# Altium PCB 28Pin_PCB.PcbDoc (part 2 of 2)
Units mm, origin at the board's own origin, x right, y up, seen from the top; angles counter-clockwise.
Board outline 68.58 x 53.34 mm, 2 copper layers (Top Layer, Bottom Layer); 103 components, 71 nets, 321 pads, 0 vias.
Unrouted connection lines stored in the file: 209.
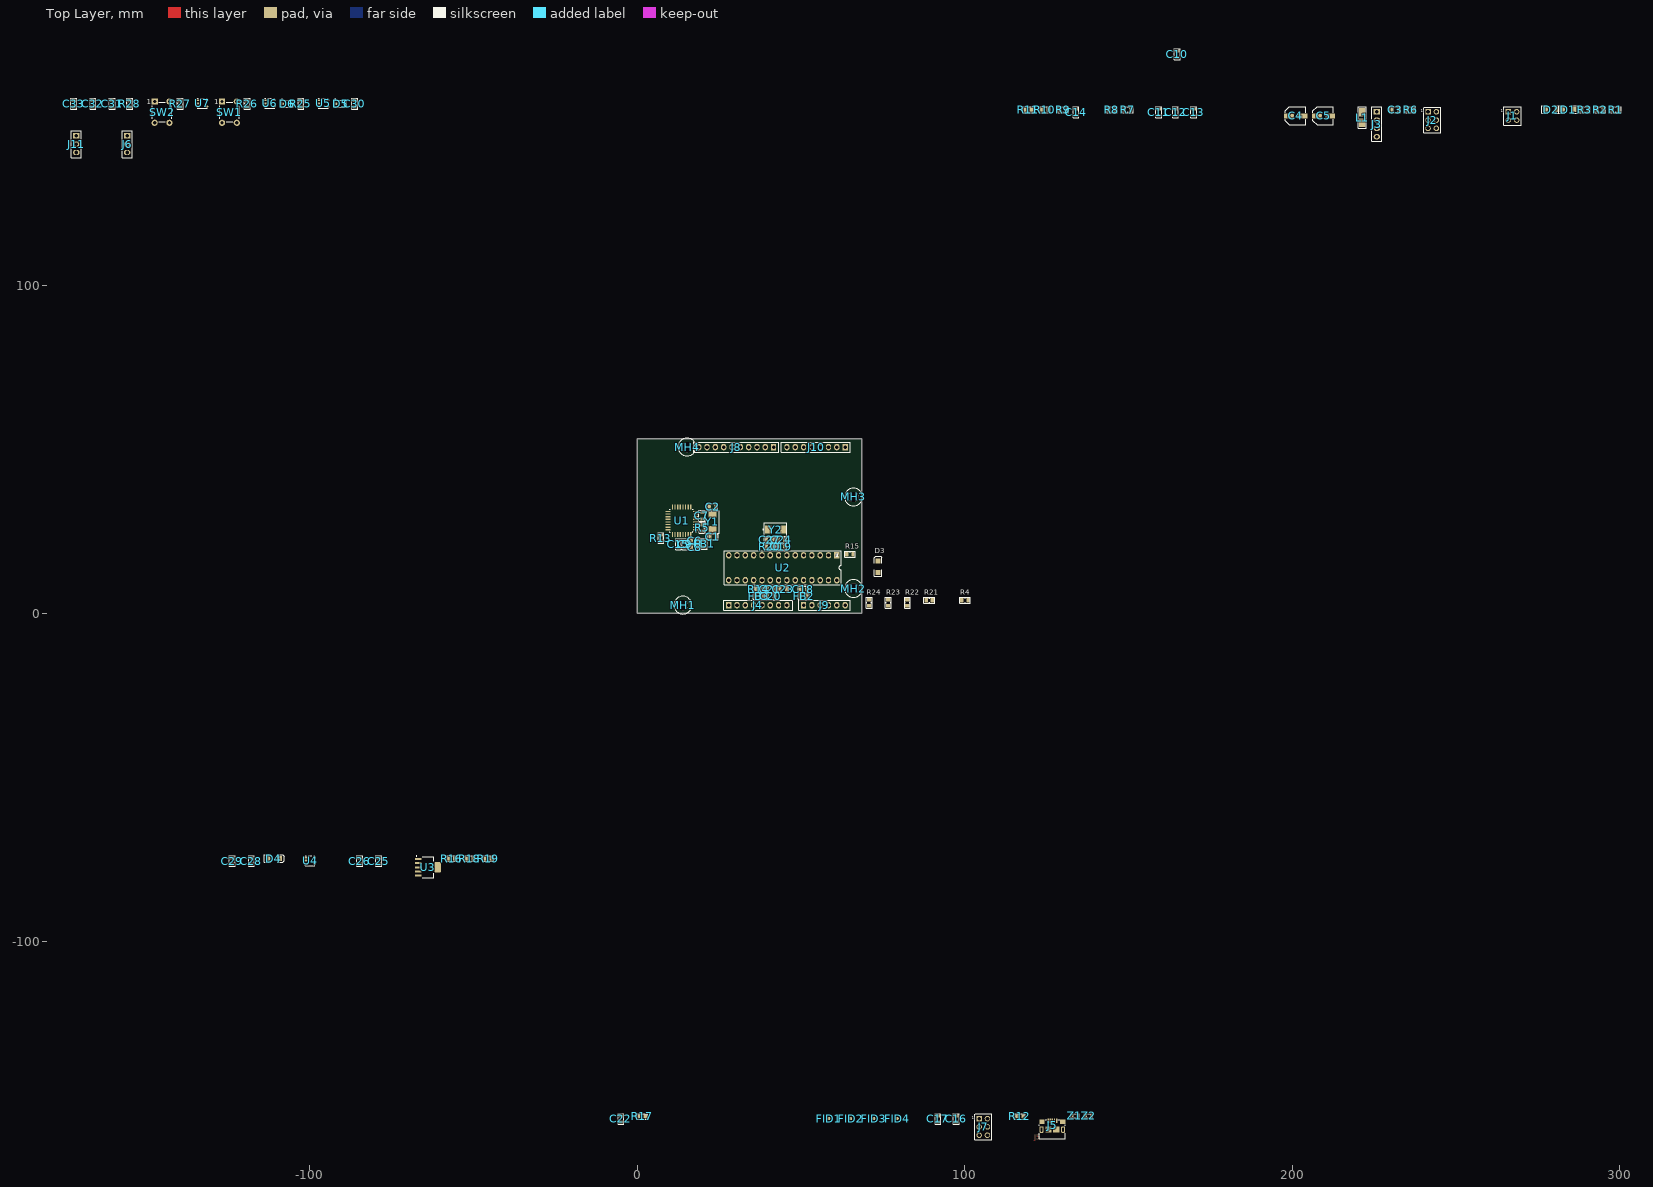
[diagram p0: Top Layer view]

## Part data (continued)
R6 R7 R10 R14 R26 R27 R28: library part CRG0805F22R, "Resistor;  Thick Film;  Res 22 Ohms;  Pwr-Rtg0.125 W;  Tol 1%;  SMT;  0805", Case Code (Imperial)=0805, Case Code (Metric)=2012, Manufacturer="TE Connectivity", Max Operating Temperature=125°C, Min Operating Temperature=-55°C, Number of Resistors=1, Package Quantity=5000, Power Rating=125mW, Resistor Type="Thick Film", Supplier Part Number 1=A126352CT-ND, Temperature Coefficient=200ppm/°C, Tolerance=1%, Voltage Rating=150V, Case/Package=0805, Category="Chip SMD Resistors", ComponentLink1Description=https://datasheet.ciiva.com/11811/0900766b800a696e-11811612.pdf?src-supplier=RSComponents, ComponentLink1URL=https://datasheet.ciiva.com/11811/0900766b800a696e-11811612.pdf?src-supplier=RSComponents, ComponentLink2Description=https://datasheet.ciiva.com/16756/70063020-16756062.pdf?src-supplier=Allied+Electronics, ComponentLink2URL=https://datasheet.ciiva.com/16756/70063020-16756062.pdf?src-supplier=Allied+Electronics, ComponentLink3Description=https://datasheet.ciiva.com/5551/eng-ds-1773204-g-5551510.pdf?src-supplier=Mouser, ComponentLink3URL=https://datasheet.ciiva.com/5551/eng-ds-1773204-g-5551510.pdf?src-supplier=Mouser, ComponentLink4Description=https://datasheet.ciiva.com/24476/eng-ds-1773204-e-24476806.pdf?src-supplier=Onlinecomponents.com, ComponentLink4URL=https://datasheet.ciiva.com/24476/eng-ds-1773204-e-24476806.pdf?src-supplier=Onlinecomponents.com, Depth=1.25mm, ELV=Compliant, Height=0.55mm, Length=2mm, Manufacturer Part Number=CRG0805F22R, Mount="Surface Mount", Number of Terminations=2, Packaging="Tape and Reel", Pricing 1="1=0.10000, 10=0.05100, 100=0.02090, 1000=0.00939, 2500=0.00815 (USD)", Radiation Hardening=No, Resistance=22R, RoHS=Yes, Stock 1=61583, Supplier 1=Digi-Key, Termination=Solder, Weight=0.000194oz, Width=1.25mm
R8 R11 R12: library part CPF0805B1K0E1, "TE CONNECTIVITY / NEOHM         CPF0805B1K0E1             SMD Chip Resistor, Thin Film, 1 kohm, 100 V, 0805 [2012 Metric], 100 mW,  0.1%, CPF Series", Case Code (Imperial)=0805, Case Code (Metric)=2012, Manufacturer="TE Connectivity Neohm", Max Operating Temperature=155°C, Min Operating Temperature=-55°C, Number of Resistors=1, Package Quantity=1000, Power Rating=100mW, Resistance=1kR, Resistance Tolerance=0.1%, Resistor Type="Thin Film", Supplier Part Number 1=A103165CT-ND, Temperature Coefficient=25ppm/°C, Voltage Rating=100V, Voltage Rating (DC)=200V, Case/Package=0805, Category="Chip SMD Resistors", ComponentLink1Description=https://datasheet.ciiva.com/30182/29261eng-ds-1773200-f-30182135.pdf?src-supplier=Onlinecomponents.com, ComponentLink1URL=https://datasheet.ciiva.com/30182/29261eng-ds-1773200-f-30182135.pdf?src-supplier=Onlinecomponents.com, ComponentLink2Description=https://datasheet.ciiva.com/7943/eng-ds-1773200-j-7943743.pdf?src-supplier=Element14, ComponentLink2URL=https://datasheet.ciiva.com/7943/eng-ds-1773200-j-7943743.pdf?src-supplier=Element14, ELV=Compliant, Height=0.55mm, Length=2mm, Manufacturer Part Number=CPF0805B1K0E1, Mount="Surface Mount", Number of Terminations=2, Packaging="Tape and Reel", Pricing 1="1=0.59000, 10=0.42100, 100=0.21890 (USD)", REACH SVHC="No SVHC", RoHS=Yes, RoHS Compliant=Yes, Series=CPF, Stock 1=1825, Supplier 1=Digi-Key, Termination=Solder, Tolerance=0.1%, Weight=0.000194oz, Width=1.25mm
R9 R13 R18 R19: library part RC0805JR-130RL, "Res Thick Film 0805 0 Ohm Molded SMD Paper T/R", Case Code (Imperial)=0805, Case Code (Metric)=2012, Manufacturer=Yageo, Max Operating Temperature=155°C, Min Operating Temperature=-55°C, Package Quantity=20000, Power Rating=125mW, Resistance=0mR, Resistor Type="Thick Film", Supplier Part Number 1=13-RC0805JR-130RLCT-ND, Temperature Coefficient=200ppm/°C, Tolerance=5%, Voltage Rating=150V, Case/Package=0805, Category="Chip SMD Resistors", ComponentLink1Description=https://datasheet.ciiva.com/17422/rc0805-17422885.pdf?src-supplier=Future+Electronics, ComponentLink1URL=https://datasheet.ciiva.com/17422/rc0805-17422885.pdf?src-supplier=Future+Electronics, ComponentLink2Description=https://datasheet.ciiva.com/5602/rc0805-257173-5602072.pdf?src-supplier=Mouser, ComponentLink2URL=https://datasheet.ciiva.com/5602/rc0805-257173-5602072.pdf?src-supplier=Mouser, Contact Plating=Tin,Matte, Height=0.5mm, Lead Free="Lead Free", Length=2mm, Manufacturer Part Number=RC0805JR-130RL, Packaging="Tape and Reel", Pricing 1="1=0.10000, 10=0.03600, 100=0.01450, 1000=0.00652, 2500=0.00566, 5000=0.00468 (USD)", Radiation Hardening=No, REACH SVHC=Unknown, RoHS=Yes, RoHS Compliant=Yes, Series=RC, Size Code=0805, Stock 1=30556, Supplier 1=Digi-Key, Termination=SMD/SMT, Voltage Rating (DC)=150V, Width=1.25mm
SW1 SW2: "6X6, H5,  160G TAC.SWITCH", Actuator Color=Black, Contact Current Rating=50mA, Contact Resistance=100mR, Manufacturer="TE Connectivity Alcoswitch", Max Operating Temperature=85°C, Max Voltage Rating (DC)=24V, Min Operating Temperature=-35°C, Operating Force=160gf, Package Quantity=750, Supplier Part Number 1=450-1650-ND, Actuator Length=0.055inch, Actuator Material=PBT, Actuator Type=Standard, Category="Pushbutton Switches", ComponentLink1Description=https://datasheet.ciiva.com/30199/1825910-6rqpn1825910-6-30199520.pdf?src-supplier=Onlinecomponents.com, ComponentLink1URL=https://datasheet.ciiva.com/30199/1825910-6rqpn1825910-6-30199520.pdf?src-supplier=Onlinecomponents.com, ComponentLink2Description=https://datasheet.ciiva.com/15184/getdatasheetpartid-395915-15184509.pdf?src-supplier=Verical, ComponentLink2URL=https://datasheet.ciiva.com/15184/getdatasheetpartid-395915-15184509.pdf?src-supplier=Verical, Contact Material="Copper Alloy", Contact Plating=Silver, Electrical Life=100000Cycles, ELV=Compliant, Illumination Type=Non-Illuminated,Illuminated, Lead Free="Lead Free", Length=5.99mm, Manufacturer Part Number=1825910-6, Max Current Rating=50mA, Mechanical Life=100000Cycles, Mount="Through Hole", Orientation=Straight, Packaging="Loose Piece", Pricing 1="1=0.10000, 10=0.10100, 25=0.09560, 100=0.08700, 250=0.08180, 500=0.07484, 1000=0.06265, 2500=0.06091, 5000=0.05743 (USD)", REACH SVHC=Unknown, RoHS=Yes, RoHS Compliant=Yes, Series=FSMJ, Stock 1=37167, Supplier 1=Digi-Key, Switch Function=Off-Mom, Switch Travel=0.25mm, Termination="PC Pins", Throw Configuration=SPST, Type=Switch
U1: "MICROCHIP - ATMEGA16U2-AU - MCU, 8BIT, MEGAAVR, 16MHZ, TQFP-32", Case/Package=A, Frequency=16MHz, Manufacturer="Microchip / Atmel", Max Operating Temperature=85°C, Max Supply Voltage=5.5V, Min Operating Temperature=-40°C, Min Supply Voltage=2.7V, Package Quantity=1250, Supplier Part Number 1=ATMEGA16U2-AU-ND, Category=Microcontrollers, ComponentLink1Description=https://datasheet.ciiva.com/13036/doc7799-28769-13036800.pdf?src-supplier=Mouser, ComponentLink1URL=https://datasheet.ciiva.com/13036/doc7799-28769-13036800.pdf?src-supplier=Mouser, ComponentLink2Description=https://datasheet.ciiva.com/22651/doc7799-22651110.pdf?src-supplier=Farnell, ComponentLink2URL=https://datasheet.ciiva.com/22651/doc7799-22651110.pdf?src-supplier=Farnell, Contact Plating=Tin,Matte, Core Architecture=AVR, Data Bus Width=8b, Height=1.05mm, Interface=SPI,UART,USB,USART,Serial, Lead Free="Lead Free", Length=7mm, Manufacturer Part Number=ATMEGA16U2-AU, Max Frequency=16MHz, Memory Size=16KB, Memory Type=FLASH, Mount="Surface Mount", Number of I/Os=22, Number of Pins=32, Number of Programmable I/O=22, Number of PWM Channels=5, Number of SPI Channels=1, Number of Timers/Counters=2, Oscillator Type=Internal, Packaging=Tray, Peripherals="Brown-out Detect/Reset,POR,PWM,WDT", Pricing 1="1=2.83000, 25=2.59600, 100=2.35400 (USD)", RAM Size=512B, REACH SVHC="No SVHC", RoHS=Yes, RoHS Compliant=Yes, Series="AVR® ATmega", Stock 1=4215, Supplier 1=Digi-Key, Watchdog Timer=Yes, Width=7mm
U2: "IC MCU 8BIT 32KB FLASH 28DIP", Case/Package=PDIP, Frequency=20MHz, Manufacturer="Microchip / Atmel", Max Operating Temperature=85°C, Max Supply Voltage=5.5V, Min Operating Temperature=-40°C, Min Supply Voltage=1.8V, Package Quantity=14, Category=Microcontrollers, ComponentLink1Description=https://datasheet.ciiva.com/19457/2139111-19457070.pdf?src-supplier=Jameco, ComponentLink1URL=https://datasheet.ciiva.com/19457/2139111-19457070.pdf?src-supplier=Jameco, ComponentLink2Description=https://datasheet.ciiva.com/1157/1684409-1157696.pdf?src-supplier=Element14, ComponentLink2URL=https://datasheet.ciiva.com/1157/1684409-1157696.pdf?src-supplier=Element14, ComponentLink3Description=https://datasheet.ciiva.com/20168/73-4283-20168380.pdf?src-supplier=Rapid+Electronics, ComponentLink3URL=https://datasheet.ciiva.com/20168/73-4283-20168380.pdf?src-supplier=Rapid+Electronics, ComponentLink4Description=https://datasheet.ciiva.com/29119/155197-da-01-en-microcontr-atmega328p-pu-8bit-pdip-28-29119593.pdf?src-supplier=Conrad, ComponentLink4URL=https://datasheet.ciiva.com/29119/155197-da-01-en-microcontr-atmega328p-pu-8bit-pdip-28-29119593.pdf?src-supplier=Conrad, ComponentLink5Description=https://datasheet.ciiva.com/26818/atmega328p-pu-26818578.pdf?src-supplier=IIIC, ComponentLink5URL=https://datasheet.ciiva.com/26818/atmega328p-pu-26818578.pdf?src-supplier=IIIC, ComponentLink6Description=https://datasheet.ciiva.com/15213/getdatasheetpartid-318533-15213133.pdf?src-supplier=Verical, ComponentLink6URL=https://datasheet.ciiva.com/15213/getdatasheetpartid-318533-15213133.pdf?src-supplier=Verical, Contact Plating=Tin,Matte, Core Architecture=AVR, Data Bus Width=8b, Height=3.28mm, Interface=I2C,SPI,UART,USART,2-Wire, Lead Free="Lead Free", Length=37.4mm, Manufacturer Part Number=ATMEGA328P-PU, Max Frequency=20MHz, Memory Size=32KB, Memory Type=FLASH, Mount="Through Hole", Number of ADC Channels=6, Number of I2C Channels=1, Number of I/Os=23, Number of Pins=28, Number of Programmable I/O=23, Number of PWM Channels=6, Number of SPI Channels=1, Number of Timers/Counters=3, Oscillator Type=Internal, Packaging=Rail/Tube, Peripherals="Brown-out Detect/Reset,POR,PWM,WDT", Pricing 1="1=2.52000, 25=2.31000, 100=2.09000 (USD)", Radiation Hardening=No, RAM Size=2KB, REACH SVHC="No SVHC", RoHS=Yes, RoHS Compliant=Yes, Series="AVR® ATmega", Stock 1=54032, Watchdog Timer=Yes, Width=6.76mm
U3: "1.5-A, 20-V, low-dropout voltage regulator with reverse current & reverse voltage protection 6-SOT-223 -40 to 125", Package="SOT-223-6 Texas Instruments", Arrow_Electronics-Purchase-URL=https://snapeda.com/shop?store=Arrow+Electronics&id=424520, BuyPart=https://www.snapeda.com/parts/TL1963A-33DCQR/Texas%20Instruments/view-part/424520/?ref=eda, Digi-Key_Part_Number=296-24534-1-ND, MF="Texas Instruments", Mouser-Purchase-URL=https://snapeda.com/shop?store=Mouser&id=424520, MP=TL1963A-33DCQR, SnapEDA_Link=https://www.snapeda.com/parts/TL1963A-33DCQR/Texas%20Instruments/view-part/424520/?ref=snap, Texas_Instruments-Purchase-URL=https://snapeda.com/shop?store=Texas+Instruments&id=424520
U4 U5 U6 U7: "TEXAS INSTRUMENTS - SN74AHC1G09DBVR - AND Gate, 74AHC1G09, 2 Input, 2 V to 5.5 V, SOT-23-5", Case/Package=SOT-23, Low Level Output Current=8mA, Manufacturer="Texas Instruments", Max Operating Temperature=125°C, Max Supply Voltage=5.5V, Min Operating Temperature=-55°C, Min Supply Voltage=2V, Output Current=25mA, Package Quantity=3000, Quiescent Current=1uA, Supplier Part Number 1=296-29202-1-ND, Category="Logic Gates", ComponentLink1Description=https://datasheet.ciiva.com/1864/sn74ahc1g09-1864410.pdf?src-supplier=Digi-Key, ComponentLink1URL=https://datasheet.ciiva.com/1864/sn74ahc1g09-1864410.pdf?src-supplier=Digi-Key, ComponentLink2Description=https://datasheet.ciiva.com/1864/sn74ahc1g09-1864411.pdf?src-supplier=Digi-Key, ComponentLink2URL=https://datasheet.ciiva.com/1864/sn74ahc1g09-1864411.pdf?src-supplier=Digi-Key, ComponentLink3Description=https://datasheet.ciiva.com/1864/sn74ahc1g09-1864412.pdf?src-supplier=Digi-Key, ComponentLink3URL=https://datasheet.ciiva.com/1864/sn74ahc1g09-1864412.pdf?src-supplier=Digi-Key, Contact Plating=Tin,Matte, Lead Free="Lead Free", Logic Function="AND GATE", Manufacturer Part Number=SN74AHC1G09DBVR, Mount="Surface Mount", Number of Bits=1, Number of Circuits=1, Number of Elements=1, Number of Gates=1, Number of Inputs=2, Number of Outputs=1, Number of Pins=5, Output Voltage=5.5V, Packaging="Tape and Reel", Pricing 1="1=0.36000, 10=0.27100, 25=0.23760, 100=0.15370, 250=0.12720, 500=0.10176, 1000=0.07802 (USD)", Propagation Delay=7.5ns, Radiation Hardening=No, REACH SVHC="No SVHC", RoHS=Yes, RoHS Compliant=Yes, Series=74AHC, Supplier 1=Digi-Key, Technology=CMOS
Y1 Y2: "16MHz Â±30ppm Crystal Series 60 Ohms 2-SMD, No Lead", Package="SMD-2 ECS International", Supplier Part Number 1=XC983CT-ND, Availability=Unavailable, MF="ECS Inc.", MP=ECS-160-S-23A-EN-TR, Price=None, SnapEDA_Link=https://www.snapeda.com/parts/ECS-160-S-23A-EN-TR/ECS%20Inc./view-part/2122006/?ref=snap, Supplier 1=Digi-Key
Z1 Z2: "VARISTOR 0603", Capacitance=0.05pF, Case Code (Imperial)=0603, Case Code (Metric)=1608, Clamping Voltage=25V, Current Rating=5nA, Manufacturer=Bourns, Max Operating Temperature=125°C, Max Voltage Rating (DC)=5V, Min Operating Temperature=-40°C, Package Quantity=1, Supplier Part Number 1=CG0603MLU-05ECT-ND, Case/Package=0603, Category=Varistors, ComponentLink1Description=https://datasheet.ciiva.com/366/mlu-366240.pdf?src-supplier=Digi-Key, ComponentLink1URL=https://datasheet.ciiva.com/366/mlu-366240.pdf?src-supplier=Digi-Key, ComponentLink2Description=https://datasheet.ciiva.com/22696/1785238-22696784.pdf?src-supplier=Element14, ComponentLink2URL=https://datasheet.ciiva.com/22696/1785238-22696784.pdf?src-supplier=Element14, ComponentLink3Description=https://datasheet.ciiva.com/15142/getdatasheetpartid-26780-15142979.pdf?src-supplier=Verical, ComponentLink3URL=https://datasheet.ciiva.com/15142/getdatasheetpartid-26780-15142979.pdf?src-supplier=Verical, ComponentLink4Description=https://datasheet.ciiva.com/11834/0900766b80dbb950-11834607.pdf?src-supplier=RSComponents, ComponentLink4URL=https://datasheet.ciiva.com/11834/0900766b80dbb950-11834607.pdf?src-supplier=RSComponents, ComponentLink5Description=https://datasheet.ciiva.com/10437/mlu-10437034.pdf?src-supplier=Avnet, ComponentLink5URL=https://datasheet.ciiva.com/10437/mlu-10437034.pdf?src-supplier=Avnet, ComponentLink6Description=https://datasheet.ciiva.com/25958/mlu-25958235.pdf?src-supplier=Avnet+Europe, ComponentLink6URL=https://datasheet.ciiva.com/25958/mlu-25958235.pdf?src-supplier=Avnet+Europe, ComponentLink7Description=https://datasheet.ciiva.com/366/mlu-366238.pdf?src-supplier=Digi-Key, ComponentLink7URL=https://datasheet.ciiva.com/366/mlu-366238.pdf?src-supplier=Digi-Key, ComponentLink8Description=https://datasheet.ciiva.com/366/mlu-366239.pdf?src-supplier=Digi-Key, ComponentLink8URL=https://datasheet.ciiva.com/366/mlu-366239.pdf?src-supplier=Digi-Key, Contact Plating=Tin, Depth=0.8mm, Leakage Current=5nA, Length=1.6mm, Manufacturer Part Number=CG0603MLU-05E, Mount="Surface Mount", Number of Channels=1, Number of Circuits=1, Number of Pins=2, Operating Supply Voltage=5V, Packaging="Tape and Reel", Pricing 1="1=0.43000, 10=0.36000, 25=0.31520, 100=0.27000, 250=0.23400, 500=0.19800, 1000=0.15300, 2500=0.13950 (USD)", Radiation Hardening=No, REACH SVHC="No SVHC", Response Time=1ns, RoHS=Yes, RoHS Compliant=Yes, Series=MLU, Stock 1=2050, Supplier 1=Digi-Key, Termination=SMD/SMT, Voltage=5V, Voltage Rating=5V, Voltage Rating (DC)=5V, Width=0.8mm, Working Voltage=5V

## Nets (pads, with @x,y where several pads share a name; then routed paths per layer and width w, separated by ;. In a path a pad name is that pad's centre, name@x,y a point inside that pad or via, vN(x,y) a via of type N, cw(c..) or ccw(c..) an arc to the next point about the centre after c; other vN are vias at no path point)
16U2_16MHZ_XTAL1: C2.2 R5.1 U1.2 Y1.1
16U2_16MHZ_XTAL2: C1.2 R5.2 U1.1 Y1.2
16U2_BUF_RESETn: C33.2 R28.2 U7.1 U7.2
16U2_MISO: J2.1 U1.17
16U2_MOSI: J2.4 U1.16
16U2_PB4: J1.1 J3.2 U1.18
16U2_PB5: J1.3 U1.19
16U2_PB6: J1.2 U1.20
16U2_PB7: J1.4 U1.21
16U2_RESETn: J3.4 R4.1 U1.24 U7.4
16U2_Rx_LED: D2.2 U1.10
16U2_RXD: R11.1 U1.8
16U2_SCLK: J2.3 R6.2
16U2_SCLK_R: R6.1 U1.15
16U2_Tx_LED: D1.2 U1.11
16U2_TXD: R8.1 U1.9
16U2PROG_328P_RESETn: J6.2 R1.1 U1.13
"328P RESETn": J4.3 J10.2 R11.2 R15.1 U2.1 U2.3
328P_16MHZ_XTAL1: C27.2 R20.1 U2.10 Y2.1
328P_16MHZ_XTAL2: C24.2 R20.2 U2.9 Y2.2
328P_AUTORESETn: C14.1 R21.1 U6.1
328P_BUF_RESETn: C32.2 R27.2 U6.2
328P_RESETn: J3.1 U6.4
+3V3: C12.1 C26.2 J4.4 J11.1 R19.2 U3.3
+3V3_16U2_UCAP: C15.2 R13.1 U1.27
+5: C9.2 U1.31
+5V: C5.1 C10.1 C25.2 J4.5 J11.3 L1.2 R18.1 U3.1
+5V/3V3: C3.2 C11.1 C13.2 C16.2 C22.2 C28.1 C29.1 C30.1 D5.1 D6.1 FB1.1 FB2.1 FB3.1 J2.2 J4.2 J7.2 J11.2 R1.2 R2.1 R3.1 R4.2 R15.2 R16.2 R17.2 R18.2 R19.1 R21.2 R22.1 R23.1 R24.1 U4.5 U5.5 U6.5 U7.5
+5V/3V3_16U2: C6.2 C7.2 C8.2 FB1.2 R13.2 U1.4 U1.32
+5V/3V3_328P_AVCC: C20.2 C21.2 FB3.2 U2.20
+5V/3V3_328P_VCC: C18.2 C19.2 FB2.2 U2.7
+5V_USB: C4.1 J5.1 L1.1
+AREF: C17.2 C23.2 J8.8 U2.21
AD0: J9.1 U2.23
AD1: J9.2 U2.24
AD2: J9.3 U2.25
AD3: J9.4 U2.26
AD4/SDA: J8.9 J9.5 U2.27
AD5/SCl: J8.10 J9.6 U2.28
BUTTON_RESETn: D5.2 R22.2 R23.2 R26.1 R27.1 SW1.3 SW1.4 SW2.3 SW2.4
CON_USB_N: J5.2 R7.1 Z1.1
CON_USB_P: J5.3 R10.1 Z2.1
GND: C1.1 C2.1 C3.1 C4.2 C5.2 C6.1 C7.1 C8.1 C9.1 C10.2 C11.2 C12.2 C13.1 C15.1 C16.1 C17.1 C18.1 C19.1 C20.1 C21.1 C22.1 C23.1 C24.1 C25.1 C26.1 C27.1 C28.2 C29.2 C30.2 C31.1 C32.1 C33.1 D4.2 J2.6 J4.6 J4.7 J5.5 J5.6 J5.7 J5.8 J5.10 J5.11 J7.6 J8.7 MH1.1 MH2.1 MH3.1 R9.2 R12.1 SW1.1 SW1.2 SW2.1 SW2.2 U1.3 U1.28 U2.8 U2.22 U3.2 U3.4 U4.3 U5.3 U6.3 U7.3 Z1.2 Z2.2
IO0: J7.5 J10.1 R8.2 U2.2
IO2: J10.3 U2.4
IO3: J10.4 U2.5
IO4: J10.5 U2.6
IO5: J10.6 U2.11
IO6: J10.7 U2.12
IO7: J10.8 U2.13
IO8: J8.1 R25.2 U2.14
IO9: J8.2 U2.15
MISO: J7.1 J8.5 U2.18
MOSI: J7.4 J8.4 U2.17
NetC14_2: C14.2 J6.1
NetD1_1: D1.1 R2.2
NetD2_1: D2.1 R3.2
NetD3_1: D3.1 R17.1
NetD3_2: D3.2 U4.4
NetD4_1: D4.1 R16.1
NetD6_2: D6.2 R24.2 R28.1
NetJ2_5: J2.5 J3.3
NetJ5_4: J5.4 R9.1
NetJ6_3: J6.3 R12.2
NetR25_1: R25.1 U5.4
SCK: J7.3 J8.6 R14.2 U4.1 U4.2
SCK_R: R14.1 U2.19
SS: J8.3 U2.16
USB_N: R7.2 U1.30
USB_P: R10.2 U1.29
USER_BUTTON_BUF: C31.2 R26.2 U5.1 U5.2
pads on no net: FID1.1 FID2.1 FID3.1 FID4.1 J4.1 J4.8 MH4.1 U1.5 U1.6 U1.7 U1.12 U1.14 U1.22 U1.23 U1.25 U1.26 U3.5 U3.6

## Text inside footprints (layer, text, board x,y; h text height)
J1: Top Overlay "1" at 263.652,152.654 h1.52
J2: Top Overlay "1" at 239.141,152.654 h1.52
J7: Top Overlay "1" at 102.108,-154.686 h1.52
SW1: Top Overlay "1" at -129.159,155.448 h1.52
SW2: Top Overlay "1" at -149.733,155.448 h1.52